# Altium PCB Integrator.PcbDoc
Units mil, origin at the board's own origin, x right, y up, seen from the top; angles counter-clockwise.
Board outline 1660 x 2440.94 mil, 2 copper layers (Top Layer, Bottom Layer); 27 components, 12 nets, 85 pads, 8 vias.
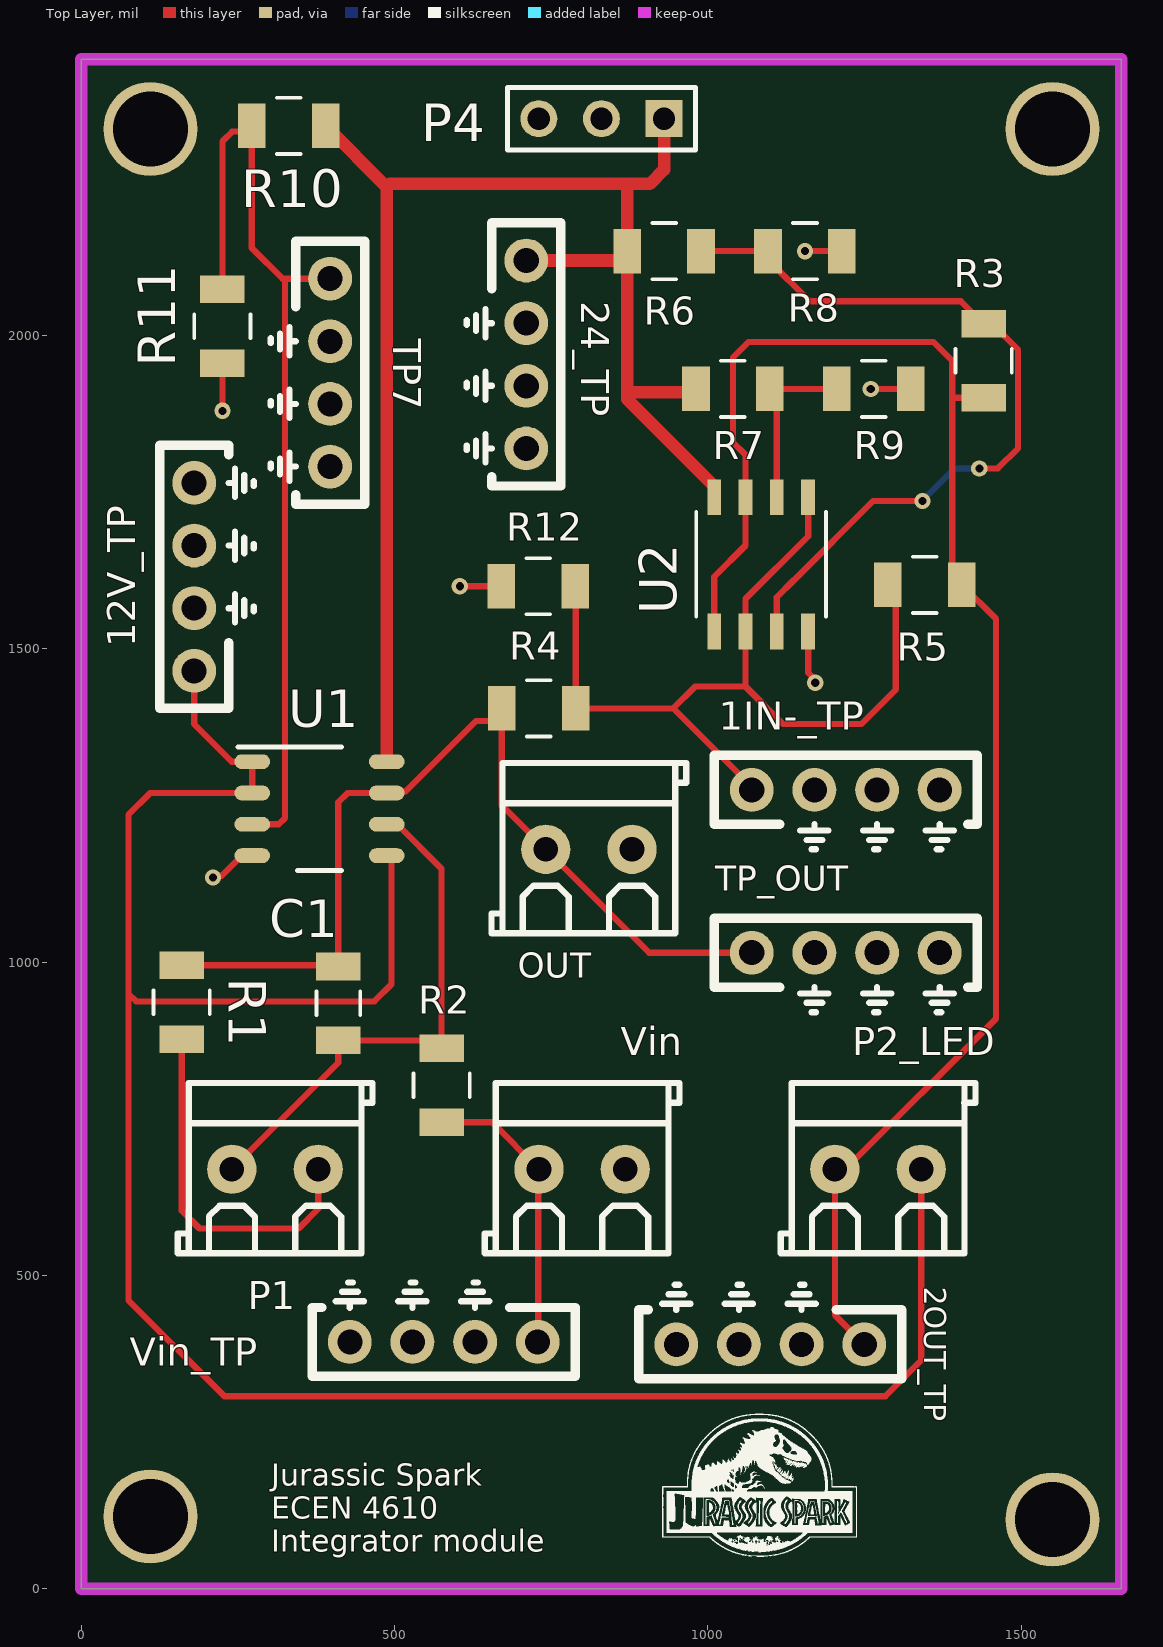
[diagram p0: Top Layer view]
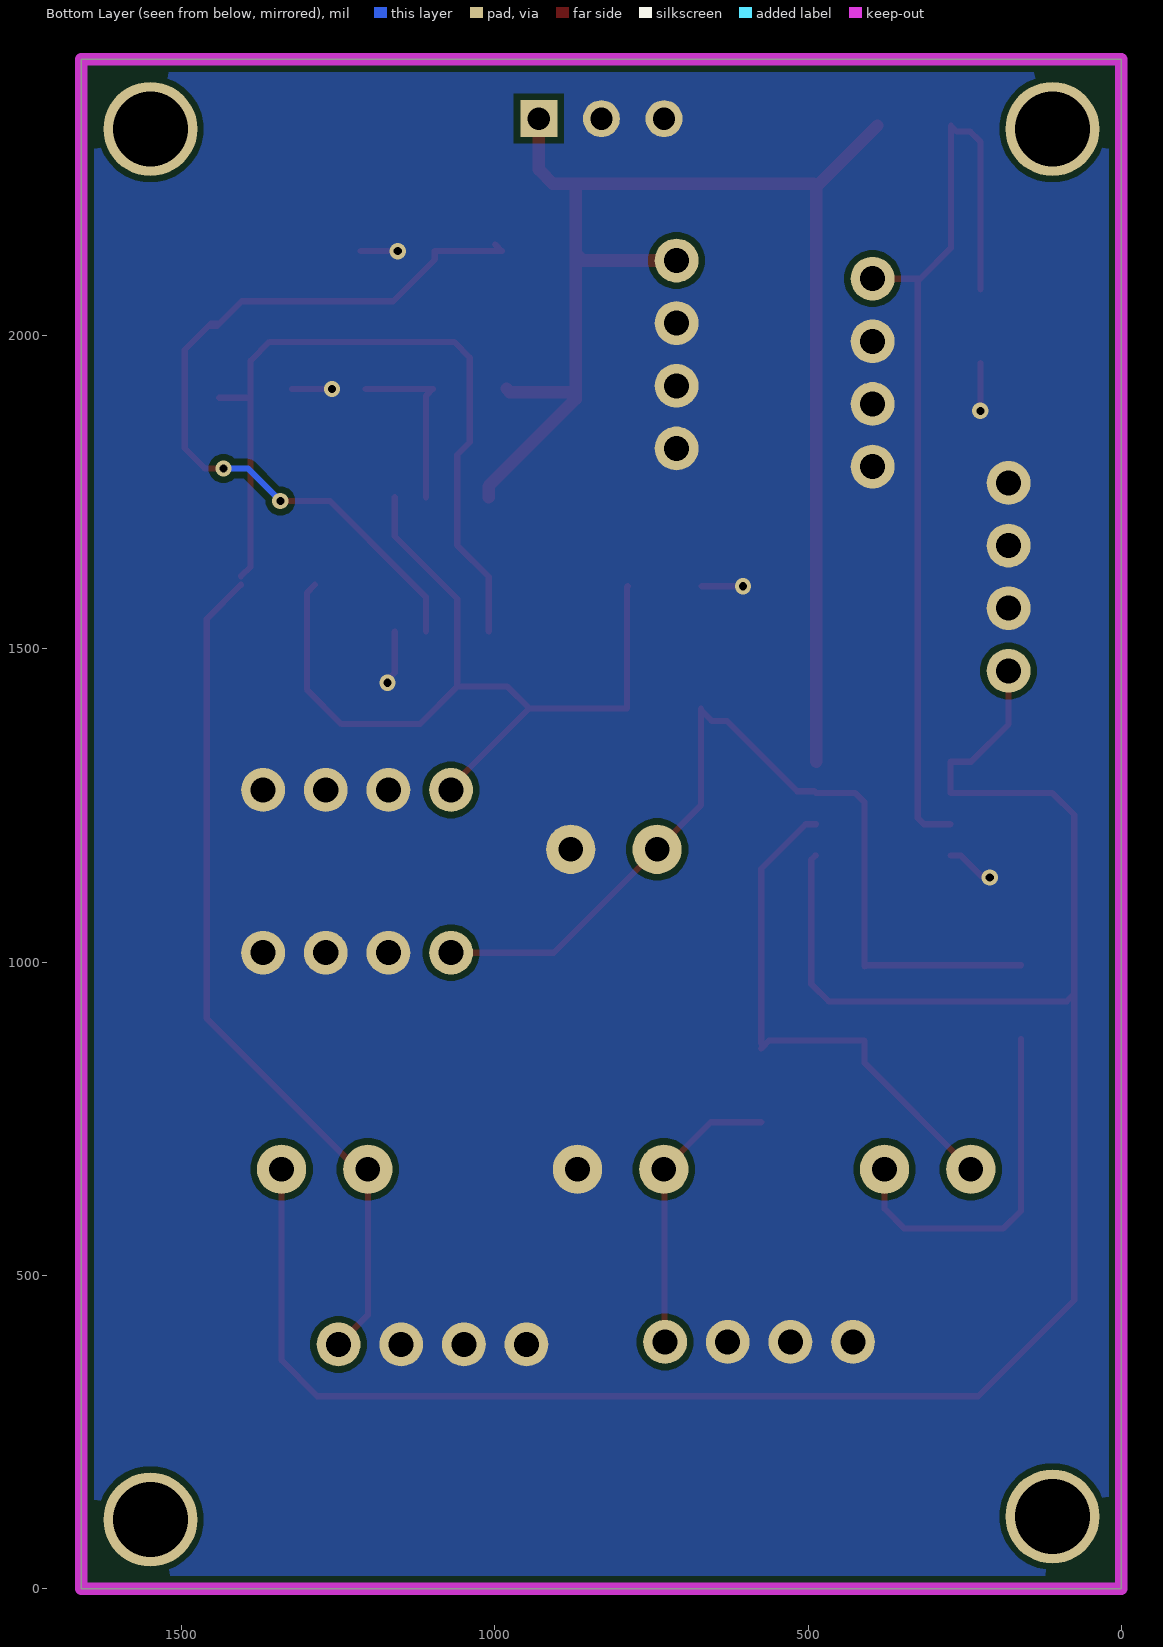
[diagram p1: Bottom Layer view, seen from below]
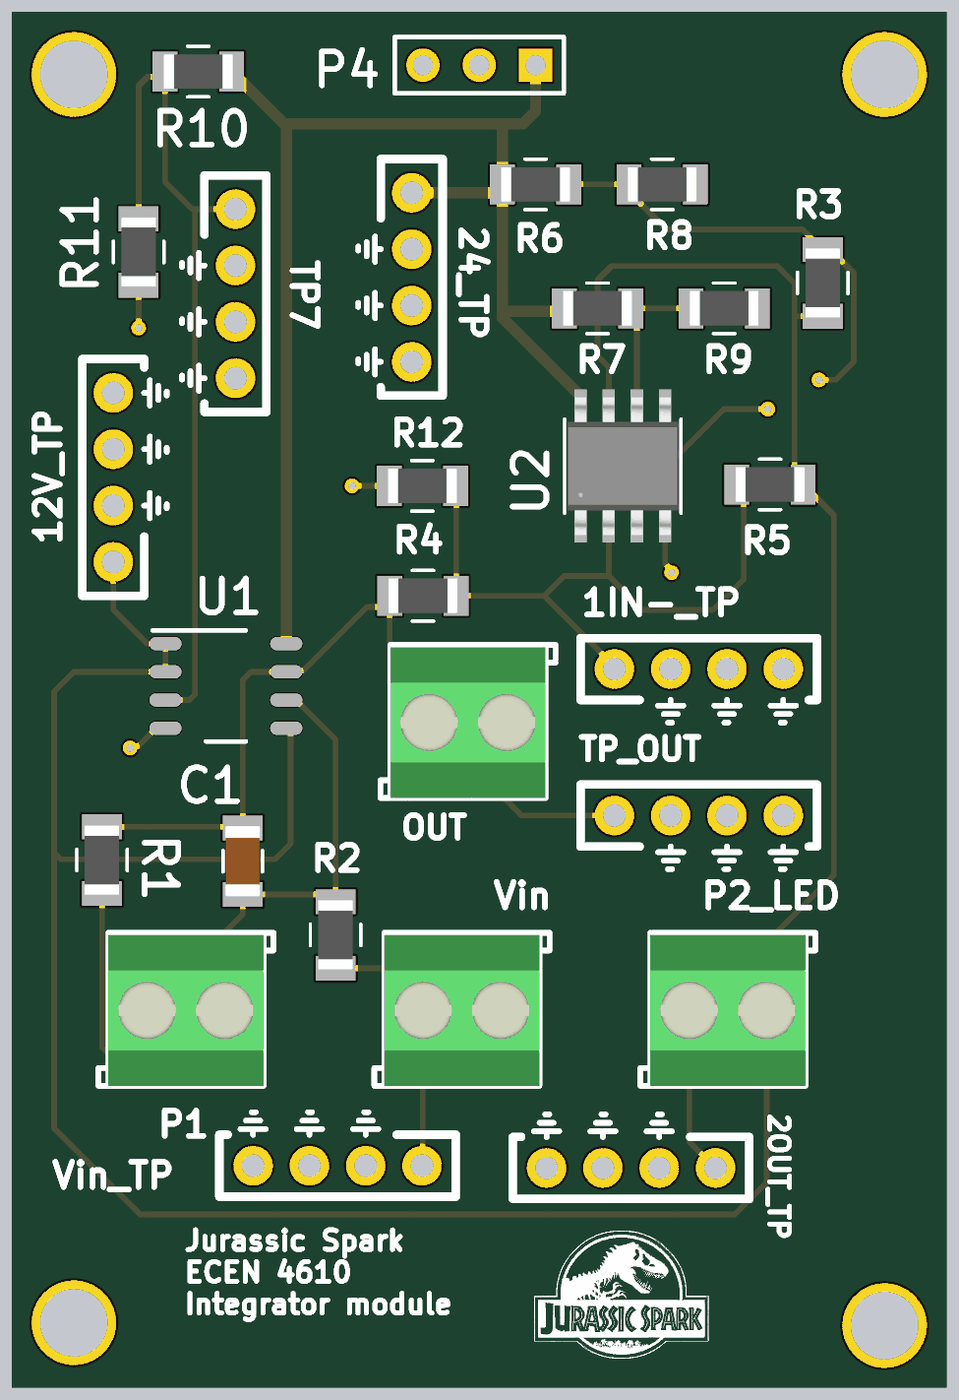
[diagram p2: 3D render of the assembled board from above, using the file's embedded part models]

## Layer stack, top to bottom
Top Solder: solder mask 0.4, Solder Resist, Dk 3.5
Top Layer: signal copper 1.4
Dielectric 1: dielectric 12.6, FR-4, Dk 4.8
Bottom Layer: signal copper 1.4
Bottom Solder: solder mask 0.4, Solder Resist, Dk 3.5

## Board outline
0,0 1660,0 1660,2440.94 0,2440.94

## Design rules (kind name [scope] priority, off if disabled: settings)
Clearance [All] p1: gap=10 ignorepadtopadclearanceinfootprint=FALSE
PlaneConnect [All] p1: planeconnectstyle=Direct reliefexpansion=20 reliefentries=4 reliefconductorwidth=10 reliefairgap=10
PolygonConnect [All] p1: connectstyle=Direct reliefconductorwidth=10 reliefentries=4 polygonreliefangle="90 Angle" airgapwidth=10
RoutingVias [All] p1: holewidth=28 width=50 viastyle="Through Hole" minholewidth=28 minwidth=50 maxholewidth=28 maxwidth=50
SolderMaskExpansion [All] p1: expansion=4 istentingtop=FALSE
SupplyNets "Schematic Supply Nets_3" [InNet('Vin')] p1: voltage=0.000
SupplyNets "Schematic Supply Nets_2" [InNet('GND')] p2: voltage=0.000
SupplyNets "Schematic Supply Nets_1" [InNet('+12')] p3: voltage=0.000
SupplyNets "Schematic Supply Nets" [InNet('+24')] p4: voltage=0.000
Width [All] p1: maxlimit=20 minlimit=10 preferedwidth=10
29 further rules are at their usual default settings.

## Components (designator, comment, footprint, x,y, rotation, side; value= is the part's Value field where it differs from the comment)
1IN-_TP "10x Probe TP" TP10x_Probe 1220,1275 r0 top
2OUT_TP "10x Probe TP" TP10x_Probe 1099.61,389.76 r180 top
12V_TP "10x Probe TP" TP10x_Probe 180,1615 r90 top
24_TP "10x Probe TP" TP10x_Probe 710,1970 r270 top
C1 "47nF" 1206_Passive_Capacitor 410,934 r90 top
OUT "2P Screw Terminal Block" "P_Terminal block 3.5mm-pitch" 810,1180 r0 top
P1 "2P Screw Terminal Block" "P_Terminal block 3.5mm-pitch" 309.06,669.29 r0 top
P2_LED "2P Screw Terminal Block" "P_Terminal block 3.5mm-pitch" 1271.65,669.29 r0 top
P4 "Header 3" HDR1X3 930,2346.46 r180 top
R1 "1k" 1206_Passive_Resitor 160,936 r90 top value="1K Ohm"
R2 "10k" 1206_Passive_Resitor 574.8,803.15 r90 top value=10KOhm
R3 "1k" 1206_Passive_Resitor 1440,1960 r90 top value="330K Ohm"
R4 "1k" 1206_Passive_Resitor 730,1405 r0 top value="1K Ohm"
R5 "1k" 1206_Passive_Resitor 1346.4,1602.36 r0 top value="330K Ohm"
R6 "52k" 1206_Passive_Resitor 930,2135 r180 top value="52K Ohm"
R7 "1M" 1206_Passive_Resitor 1040,1915 r180 top value="1M Ohm"
R8 "1k" 1206_Passive_Resitor 1155,2135 r180 top value="50K Ohm"
R9 "10k" 1206_Passive_Resitor 1265,1915 r180 top value=10KOhm
R10 "10k" 1206_Passive_Resitor 331,2335 r0 top value=10KOhm
R11 "10k" 1206_Passive_Resitor 225,2015 r90 top value=10KOhm
R12 "1k" 1206_Passive_Resitor 729,1600 r0 top value="1K Ohm"
TP7 "10x Probe TP" TP10x_Probe 397,1941 r270 top
TP_OUT "10x Probe TP" TP10x_Probe 1220,1015 r0 top (schematic designator OUT)
U1 "OPA2196IDR" D0008A_N 380,1245 r0 top
U2 "LM393DR" D8 1085,1635 r90 top
Vin "2P Screw Terminal Block" "P_Terminal block 3.5mm-pitch" 799.21,669.29 r0 top
Vin_TP "10x Probe TP" TP10x_Probe 578.35,393.7 r180 top

## Footprints (in the part's own frame and the unit in brackets; to place one, negate y for a bottom-side part, rotate by r counter-clockwise, add the part's x,y. Pads: shape width x height; smd on the part's side, far side on the other; paste and mask are expansions set on the pad)
1206_Passive_Capacitor [mil]
  rect 44x71 smd: 1(-59,0) 2(59,0)
  silkscreen extent -19,-35 19,35, body extent -63,-31 63,32, height 50
1206_Passive_Resitor [mil]
  rect 44x71 smd: 1(-59,0) 2(59,0)
  silkscreen extent -19,-45 19,45, body extent -61,-31 61,31, height 26
D8 [mil]
  rect 57.28x21.97 smd paste+0 mask+0: 1(-107.14,75) 2(-107.14,25) 3(-107.14,-25) 4(-107.14,-75) 5(107.14,-75) 6(107.14,-25) 7(107.14,25) 8(107.14,75)
  silkscreen extent -84,-104 84,104, body extent -122,-99 122,99, height 69
D0008A_N [mm]
  oval 1.45x0.6 smd paste+0 mask+0.051: 1(-2.725,1.905) 2(-2.725,0.635) 3(-2.725,-0.635) 4(-2.725,-1.905) 5(2.725,-1.905) 6(2.725,-0.635) 7(2.725,0.635) 8(2.725,1.905)
  silkscreen extent -3.3,-2.5 0.9,2.5
HDR1X3 [mm] "Connector; Header; 3 Position"
  rect 1.5x1.5 hole 0.9: 1(0,0)
  round 1.5 hole 0.9: 2(2.54,0) 3(5.08,0)
  silkscreen extent -1.27,-1.27 6.35,1.27
"P_Terminal block 3.5mm-pitch" [mm]
  round 2 hole 1: 1(-1.75,0) 2(1.75,0)
  silkscreen extent -3.95,-3.4 3.95,3.5, body extent -3.5,-3.4 3.5,3.4, height 8.4
TP10x_Probe [mil] "Small Probs footprint"
  round 70 hole 40: 1(-150,0) 2(-50,0) 2(50,0) 2(150,0)
  silkscreen extent -210,-95 210,55

## Part data
1IN-_TP 2OUT_TP 12V_TP 24_TP TP7 TP_OUT Vin_TP: library part TP_10x_Probe, "Test Point 300 mil centers"
C1: library part C_47nF_1206, "47nF ±5% 50V C0G 1206 Multilayer Ceramic Capacitors MLCC - SMD/SMT RoHS", LCSC Part#=C21812, MFR Part #=GRM31M5C1H473JA01L, Datasheet=https://datasheet.lcsc.com/lcsc/1810201313_Murata-Electronics-GRM31M5C1H473JA01L_C21812.pdf, Type=Extended
OUT P1 P2_LED Vin: library part "P_Terminal block", "Green Straight pin 3.5mm  pitch; P=3.5mm  Screw terminal ROHS", LCSC Part#=C474892, Manufacturer="Cixi Kefa Elec", MFR Part #=KF350-3.5-2P, Datasheet=https://datasheet.lcsc.com/lcsc/2001160007_Cixi-Kefa-Elec-KF350-3-5-2P_C474892.pdf
P4: "Header, 3-Pin", LatestRevisionDate=17-Jul-2002, LatestRevisionNote="Re-released for DXP Platform.", Publisher="Altium Limited"
R1 R3 R4 R5 R8 R12: library part R_1K_1206, "CHIP RESISTOR - SURFACE MOUNT 1KOHMS ±1% 1/4W 1206 ROHS", LCSC Part#=C4410, MFR Part #=RNCP1206FTD1K00CT, Digikey Link=https://www.digikey.com/product-detail/en/RNCP1206FTD1K00/RNCP1206FTD1K00CT-ND/2240675/?itemSeq=304982373, Type=Basic
R2 R9 R10 R11: library part R_10KOhm_1206, "10 kOhms ±5% 0.25W, 1/4W Chip Resistor 1206 (3216 Metric) Automotive AEC-Q200 Thick Film", LCSC Part#=C17902, MFR Part #=RMCF1206FT10K0, Digikey Link=https://www.digikey.com/en/products/detail/stackpole-electronics-inc/RMCF1206FT10K0/1759669, Type=Basic
R6: library part R_1K_1206, "CHIP RESISTOR - SURFACE MOUNT 52KOHMS ±1% 1/4W 1206 ROHS", LCSC Part#=C4410, MFR Part #=RNCP1206FTD1K00CT, Digikey Link=https://www.digikey.com/product-detail/en/RNCP1206FTD1K00/RNCP1206FTD1K00CT-ND/2240675/?itemSeq=304982373, Type=Basic
R7: library part R_1M_1206, "CHIP RESISTOR - SURFACE MOUNT 1MOHMS ±1% 1/4W 1206 ROHS", LCSC Part#=C17927, MFR Part #=RMCF1206JT1M00, Digikey Link=https://www.digikey.com/product-detail/en/RMCF1206JT1M00/RMCF1206JT1M00CT-ND/1942830/?itemSeq=304982358, Type=Basic
U1: "Dual, 36-V, low power, all-purpose amplifier with mux-friendly input 8-SOIC -40 to 125", Manufacturer_Name="Texas Instruments", Copyright="Copyright (C) 2026 Ultra Librarian. All rights reserved.", Datasheet=https://www.ti.com/lit/gpn/opa2196, Manufacturer_Part_Number=OPA2196IDR, RefDes=RefDes, Type=TYPE
U2: "Dual differential comparator, commercial grade 8-SOIC 0 to 70", Manufacturer_Name="Texas Instruments", Copyright="Copyright (C) 2025 Ultra Librarian. All rights reserved.", Manufacturer_Part_Number=LM393DR, RefDes=RefDes, Type=Type

## Free pads (board coordinates)
  round 150 hole 120: 2(110,115) 2(110,2330) 2(1550,110) 2(1550,2330)

## Via types
v1: diameter 26, hole 13, Top Layer to Bottom Layer, 8 vias

## Nets (pads, with @x,y where several pads share a name; then routed paths per layer and width w, separated by ;. In a path a pad name is that pad's centre, name@x,y a point inside that pad or via, vN(x,y) a via of type N, cw(c..) or ccw(c..) an arc to the next point about the centre after c; other vN are vias at no path point)
1IN+: R3.2 R6.1 R8.2 U2.3 | length 1307.8
  Top Layer w10: R6.1@999.61,2145.61 R6.1 R8.2 1096,2121.5 1162.5,2055 1403.89,2055 1443.19,2015.69 R3.2@1456.69,2015.69 ; U2.3 1110,1582.5 1137.5,1610 1137.56,1610 1263.78,1736.22 v1(1342.52,1736.22) ; v1(1433.41,1788.06) 1463.06,1788.06 1495.12,1820.12 1495.12,1977.38 1453.5,2019 R3.2
  Bottom Layer w10: v1(1342.52,1736.22) 1394.36,1788.06 v1(1433.41,1788.06)
1IN-: 1IN-_TP.1 R4.2 R5.1 R12.2 U2.2 U2.5 | length 1468.5
  Top Layer w10: R12.2 789,1599 R4.2 945,1405 ; 1IN-_TP.1@1075,1275 945,1405 ; U2.5 1160,1680 1060,1580 U2.2 1060,1440 ; R5.1 1300,1589.76 1300,1435 1245,1380 1120,1380 1060,1440 ; 945,1405 980,1440 1060,1440
2IN-: R7.1 R9.2 U2.6 | length 284.4
  Top Layer w10: U2.6 1110,1904 R7.1 R9.2
2OUT: 2OUT_TP.1 P2_LED.1 R3.1 R5.2 U2.1 U2.7 | length 2610.7
  Top Layer w10: U2.1 1010,1615 1060,1665 U2.7 1060,1810 1040,1830 1040,1965 1065,1990 1360,1990 1390,1960 1390,1900 ; 2OUT_TP.1 1202.76,436.61 P2_LED.1 1219.29,669.29 1460,910 1460,1547.76 R5.2 ; R5.2@1405.4,1615.86 1390,1631.26 1390,1900 ; R3.1 1391,1901 1390,1900
+12: 12V_TP.1 P2_LED.2 U1.1 U1.2 U1.5 | length 3539.9
  Top Layer w10: 12V_TP.1@175,1460 180,1455 180,1380 240,1320 U1.1 U1.2 110,1270 75,1235 75,949.57 ; U1.5 488.71,1170 495,1163.71 495,965 467.28,937.28 87.28,937.28 75,949.57 ; P2_LED.2 1340.55,364.17 1283.46,307.09 228.35,307.09 75,460.43 75,949.57
+24: 24_TP.1 P4.1 R6.2 R7.2 R10.2 U1.8 U2.8 | length 2430
  Top Layer w20: R10.2 487.28,2237.72 ; U1.8 487.28,2237.72 ; 24_TP.1 859,2120 871,2132 R6.2 ; P4.1 930,2265 907.5,2242.5 870.5,2242.5 ; R7.2 976,1910 871,1910 ; U2.8 1010,1759.8 871,1898.8 871,1910 ; 487.28,2237.72 492.07,2242.5 870.5,2242.5 ; 870.5,2242.5 871,2242 R6.2 ; 871,1910 R6.2
GND: 1IN-_TP.2 2OUT_TP.2 12V_TP.2 24_TP.2 OUT.2 P4.2 P4.3 R8.1 R9.1 R11.1 R12.1 TP7.2 TP_OUT.2 U1.4 U2.4 Vin.2 Vin_TP.2 | length 428.8
  Top Layer w10: v1(210,1135) 213.06,1138.06 224.05,1138.06 255.98,1170 U1.4 ; v1(225,1880) R11.1 ; v1(604,1600) R12.1 ; v1(1155,2135) R8.1 ; U2.4 1160,1461.82 1171.44,1450.38 v1(1171.44,1446.05) ; v1(1260,1915) R9.1
NetP1_2: P1.2 R1.1 | length 579.6
  Top Layer w10: R1.1 160,603.27 188.47,574.8 346.53,574.8 377.95,606.22 P1.2
NetR10_1: R10.1 R11.2 TP7.1 U1.3 | length 1547.1
  Top Layer w10: R11.2 225,2310 240.86,2325.86 262.86,2325.86 R10.1 272,2140 321,2091 ; U1.3 315,1220 325,1230 325,2091 TP7.1
"U3 OUT": C1.2 OUT.1 R1.2 R4.1 TP_OUT.1 U1.7 | length 1489
  Top Layer w10: R1.2 408,995 C1.2 410,1255 425,1270 U1.7 489.89,1272.61 517.61,1272.61 630,1385 654,1385 671,1402 R4.1 671,1250.1 OUT.1 906.1,1015 TP_OUT.1
U3-: C1.1 P1.1 R2.2 U1.6 | length 842.1
  Top Layer w10: P1.1 410,839.13 C1.1 561.95,875 R2.2 ; U1.6 504.02,1220 574.8,1149.21 R2.2@574.8,870.15
Vin: R2.1 Vin.1 Vin_TP.1 | length 462.9
  Top Layer w10: R2.1 655.46,744.15 Vin.1 729.33,668.31 729.33,394.69 Vin_TP.1

## Polygon pours and split planes (outlines as drawn)
GND on Bottom Layer "GND_L02_P000" (solid, pour order 0): 0,2440.94 0,0 1653.54,0 1653.54,2440.94

## Keep-outs
Keep-Out Layer:
  the board outline again, w20

## Silkscreen, mask and mechanical layers (free items; w line width, h text height)
Top Overlay:
  drawing of 50 lines, arcs and shapes, not listed
  text "Jurassic Spark / ECEN 4610 / Integrator module" at 303.15,59.06 h35

## Text inside footprints (layer, text, board x,y; h text height)
U2: Mechanical 13 "*" at 1039.5,1559 h50 r90